# Altium PCB Motor-20.PcbDoc
Units mil, origin at the board's own origin, x right, y up, seen from the top; angles counter-clockwise.
Board outline 792.43 x 792.43 mil, 4 copper layers (Top1, Signal2, Gnd3, Bottom4), stack 30.634 mil thick; 54 components, 63 nets, 207 pads, 120 vias.
Unrouted connection lines stored in the file: 54.
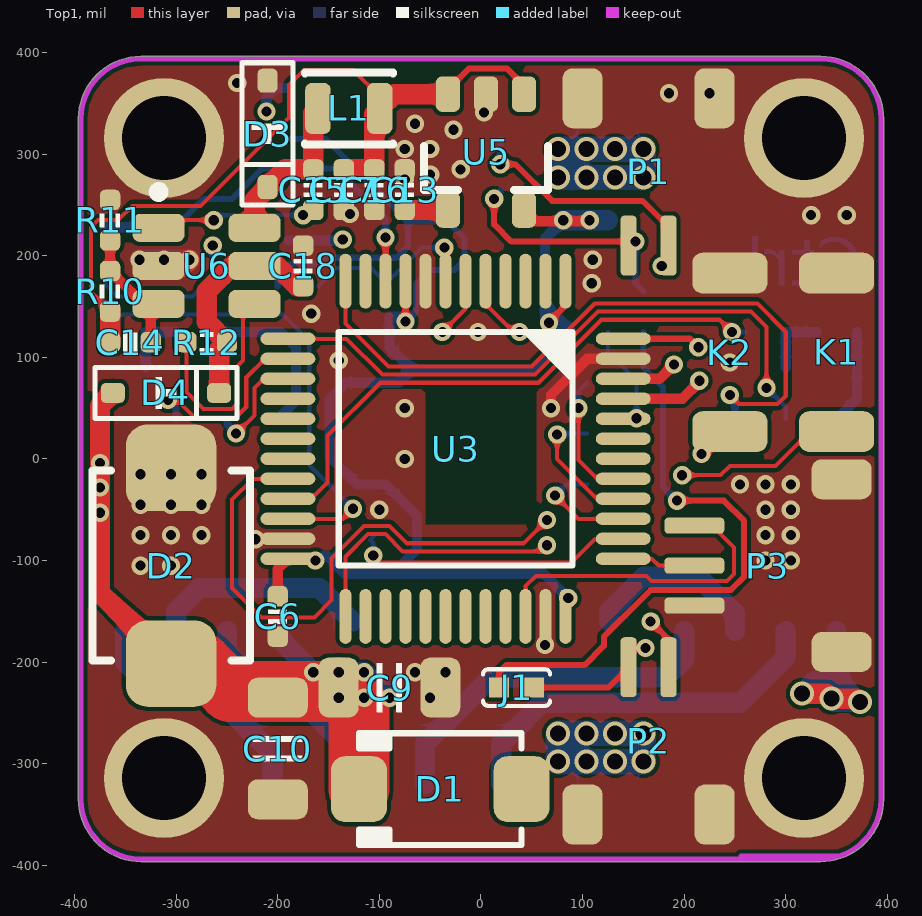
[diagram p0: Top1 view]
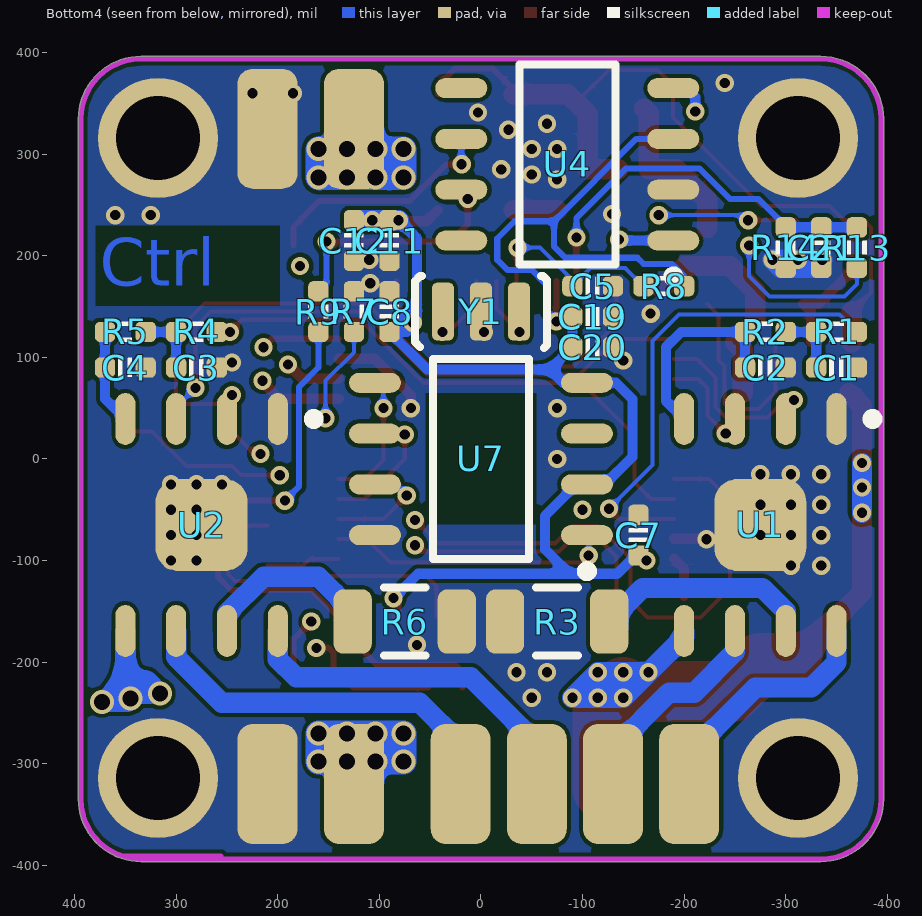
[diagram p1: Bottom4 view, seen from below]
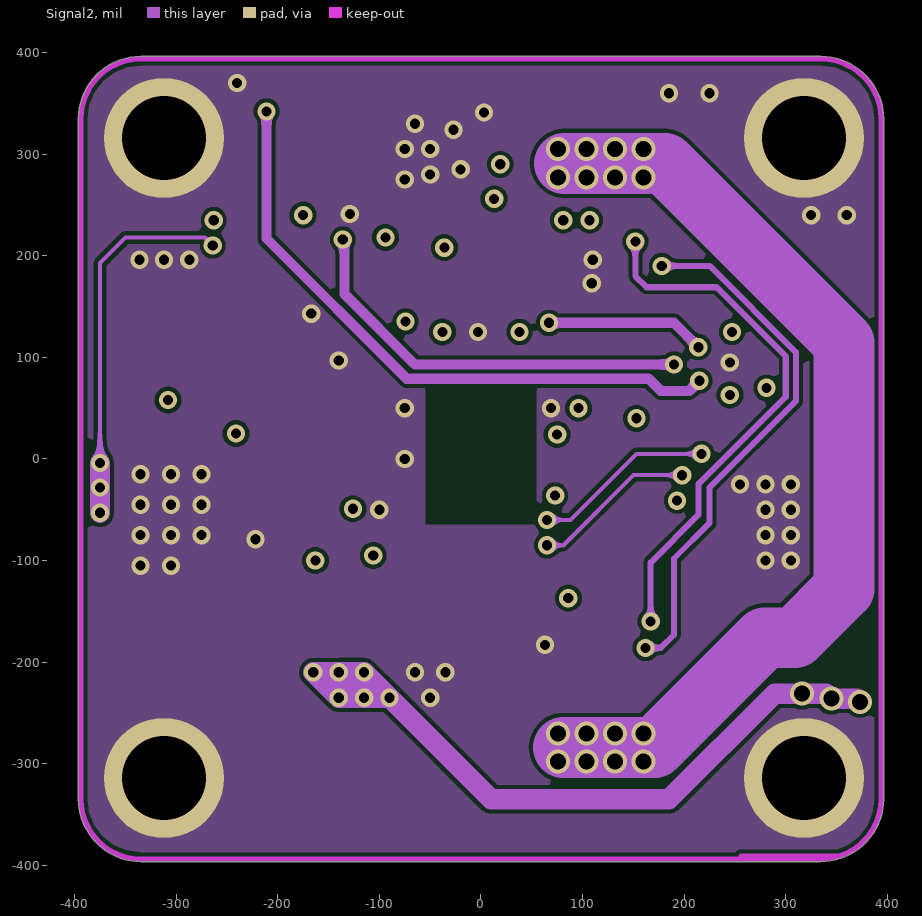
[diagram p2: Signal2]
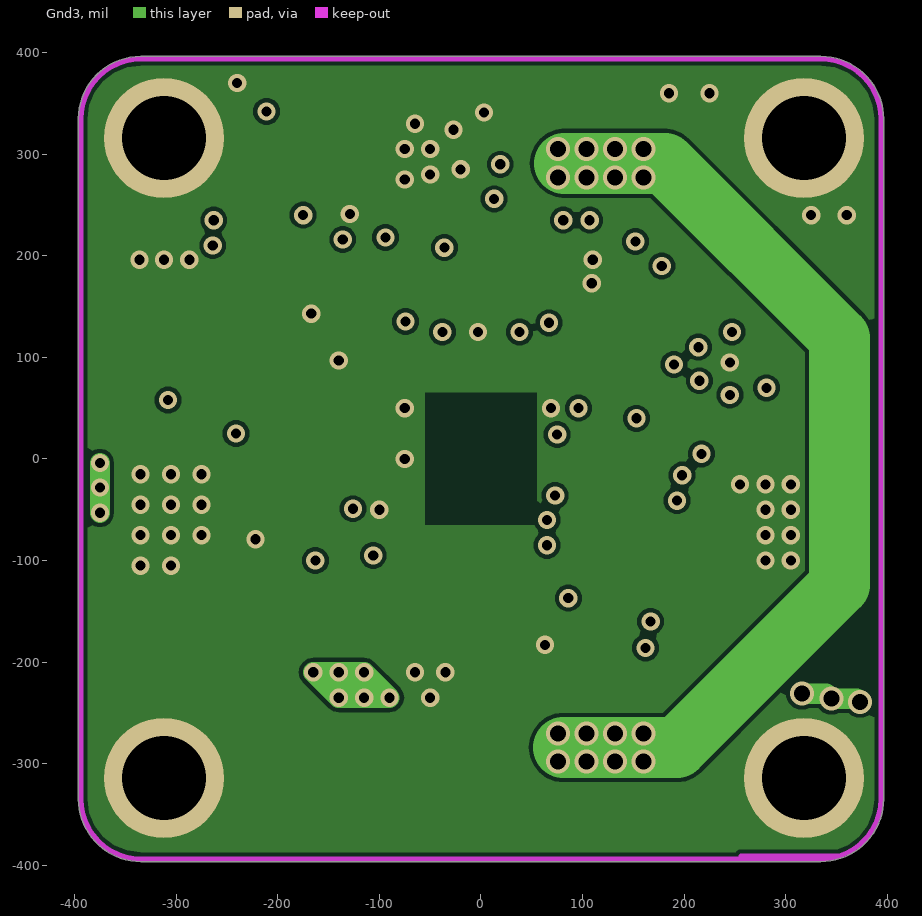
[diagram p3: Gnd3]
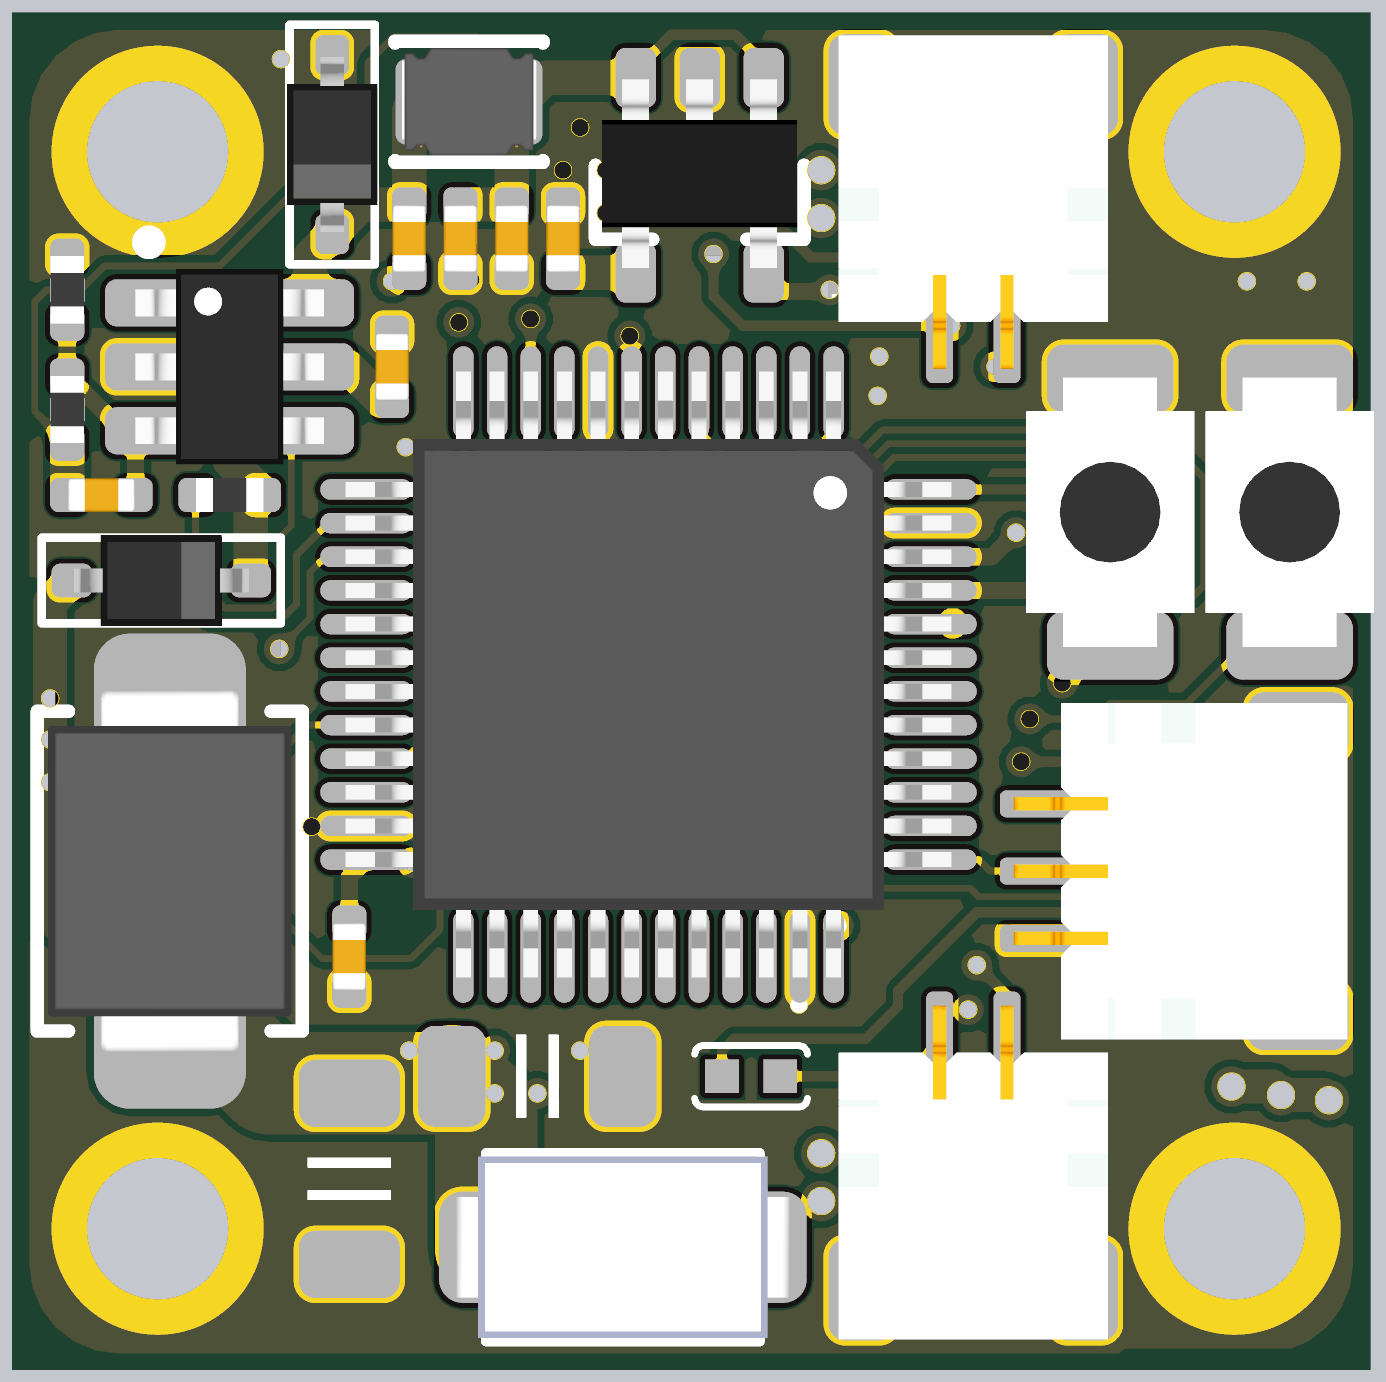
[diagram p4: 3D render of the assembled board from above, using the file's embedded part models]
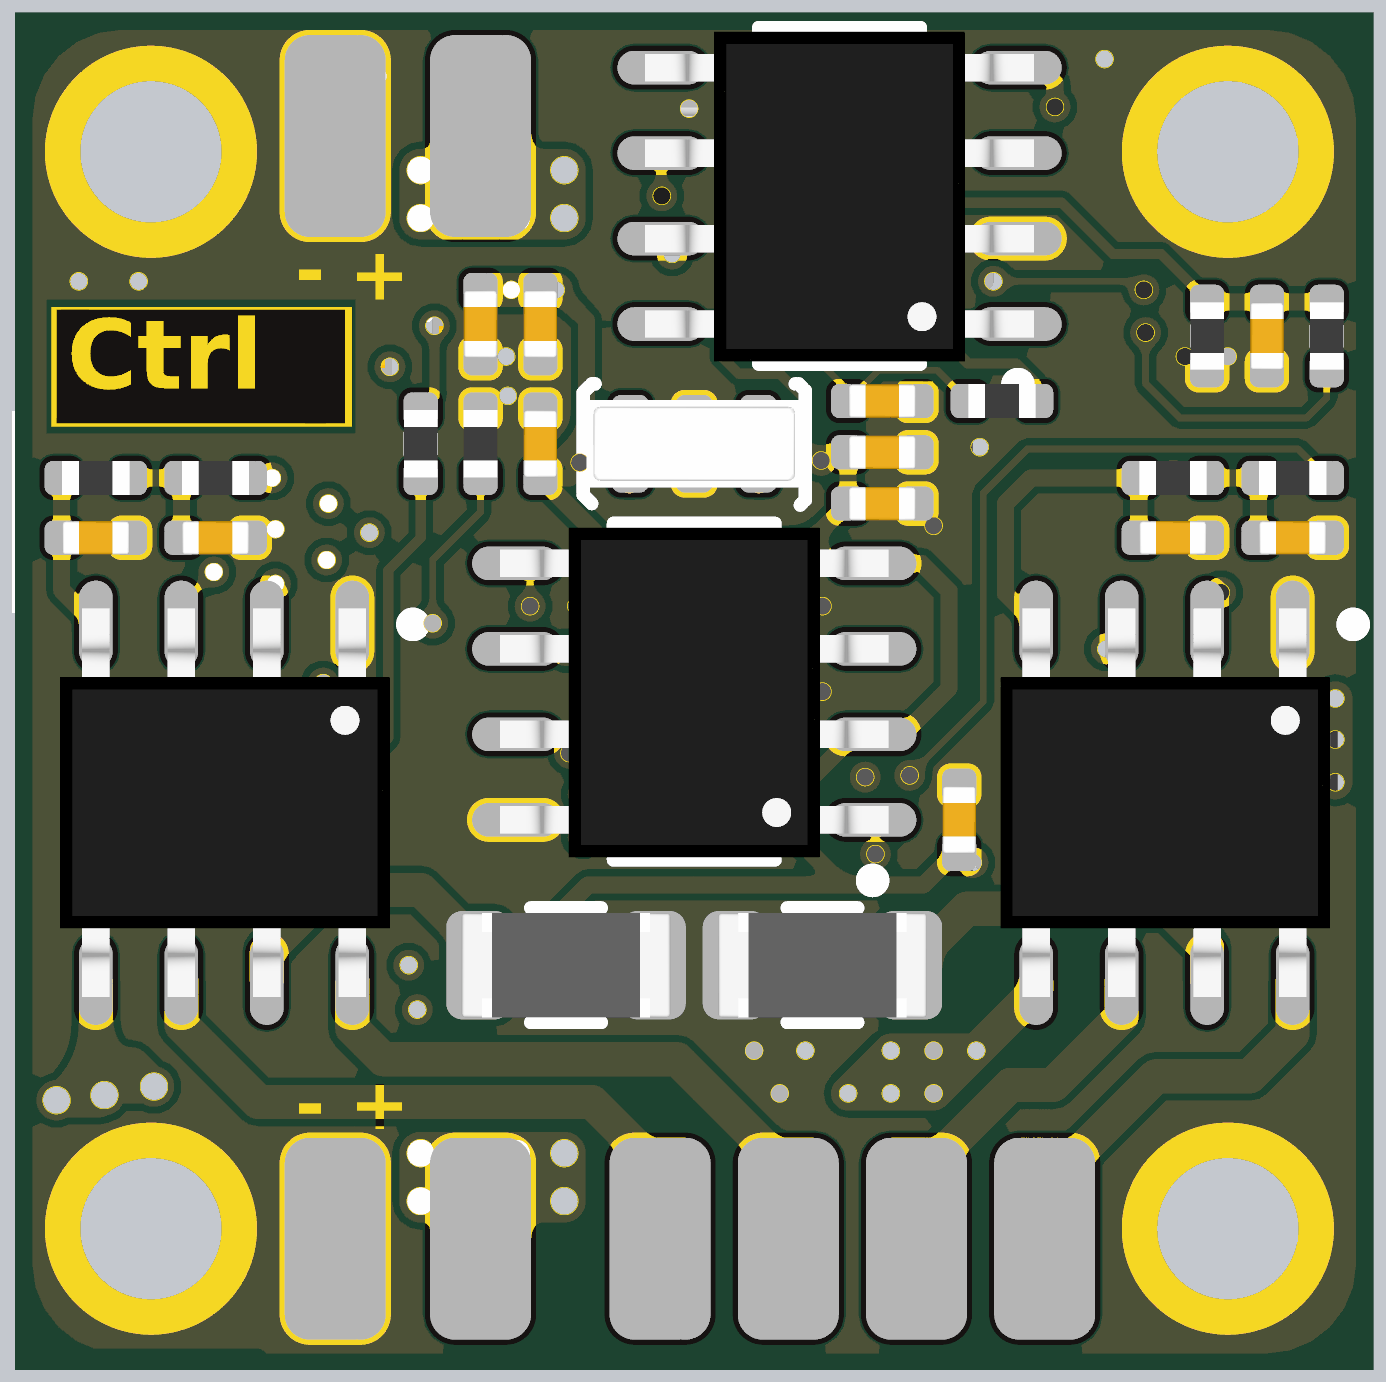
[diagram p5: 3D render of the assembled board from below, using the file's embedded part models]

## Layer stack, top to bottom
Top Solder: solder mask 0.4, Solder Resist, Dk 3.5
Top1: signal copper 1.4
Dielectric1: core 10, FR-4, Dk 4.2
Signal2: signal copper 1.417
Dielectric2: core 10, Dk 4.2
Gnd3: signal copper 1.417
Dielectric3: prepreg 5, Dk 4.2
Bottom4: signal copper 1.4
Bottom Solder: solder mask 0.4, Solder Resist, Dk 3.5

## Board outline
-396.22,-334.65 -396.22,334.65 cw(c-334.65,334.65) -334.65,396.22 334.65,396.22 cw(c334.65,334.65) 396.22,334.65 396.22,-334.65 cw(c334.65,-334.65) 353.73,-393.18 cw(c334.65,-334.65) 334.65,-396.22 -334.65,-396.22 cw(c-334.65,-334.65)

## Design rules (kind name [scope] priority, off if disabled: settings)
Clearance [All] p1: gap=4 ignorepadtopadclearanceinfootprint=FALSE except(0: Arc-Hole Track-Hole SMDPad-Hole THPad-Hole Via-Hole Fill-Hole Poly-Hole Region-Hole Text-Hole)
ComponentClearance [All] p1: gap=0 collisioncheckmode=3 verticalgap=0 showdistances=FALSE
DiffPairsRouting [All] p1: maxlimit=9 minlimit=9 mostfreqgap=9 toplayer_minwidth=15 toplayer_maxwidth=15 toplayer_prefwidth=15 midlayer1_minwidth=15 midlayer1_maxwidth=15 midlayer1_prefwidth=15 midlayer2_minwidth=15 midlayer2_maxwidth=15 midlayer2_prefwidth=15 bottomlayer_minwidth=15 bottomlayer_maxwidth=15 bottomlayer_prefwidth=15 maxuncoupledlength=500
FanoutControl Fanout_BGA [All] p1: bgadir=Out bgaviamode=Centered fanoutstyle=Auto fanoutdirection=Alternating viagrid=1 // Fanout_BGA (Default Rule)
HoleSize [All] p1: absolutevalues=TRUE maxlimit=10000 minlimit=8 maxpercent=80.000 minpercent=20.000
MinimumSolderMaskSliver [All] p1 off: minsoldermaskwidth=2
PlaneClearance [All] p1: clearance=8
PlaneConnect [All] p1: planeconnectstyle=Direct reliefexpansion=20 reliefentries=4 reliefconductorwidth=10 reliefairgap=10
PolygonConnect [All] p1: connectstyle=Direct reliefconductorwidth=10 reliefentries=4 polygonreliefangle="90 Angle" airgapwidth=10
RoutingVias [All] p1: holewidth=8 width=16 viastyle="Through Hole" minholewidth=6 minwidth=12 maxholewidth=28 maxwidth=50
SilkToSilkClearance [All] p1: silktosilkclearance=0
SilkToSolderMaskClearance [IsPad] p1: minsilkscreentomaskgap=0 clearancetoexposedcopper=TRUE
SolderMaskExpansion [All] p1: expansion=3 istentingtop=FALSE
Width GND [(InNet('AGND') OR InNet('GND'))] p1: maxlimit=50 minlimit=4 preferedwidth=10
Width VCC [(InNet('VDD_SYS_3.3V') OR InNet('VDD_AV_3.3V') OR InNet('VDD_5V') OR InNet('VDD1V2-SYS') OR InNet('VDD1V1-EPHY') OR InNet('VDD-CPUX') OR InNet('VDD-CPUS') OR InNet('VDD-CPUFB') OR InNet('VCC-DRAM'))] p2: maxlimit=50 minlimit=4 preferedwidth=10
Width [All] p3: maxlimit=10000 minlimit=4 preferedwidth=4
21 further rules are at their usual default settings.

## Classes and differential pairs
component class Port: J1 K1 K2 P1 P2 P3 R9 U4
component class MCU: C5 C6 C7 C8 R7 R8 U3 Y1
component class Interface: C19 R13 R14 U7
component class Drive: C1 C2 C3 C4 R1 R2 R3 R4 R5 R6 U1 U2
component class Power: C9 C10 C11 C12 C14 C15 C17 D1 D2 D3 D4 L1 R10 R11 R12 U5 U6

## Components (designator, comment, footprint, x,y, rotation, side; value= is the part's Value field where it differs from the comment)
C1 "0.1uF" CAP_0402 -350,90 r0 bottom value=0.1u
C2 "0.1uF" CAP_0402 -280,90 r0 bottom value=0.1u
C3 "0.1uF" CAP_0402 280,90 r0 bottom value=0.1u
C4 "0.1uF" CAP_0402 350,90 r0 bottom value=0.1u
C5 "0.1uF" CAP_0402 -110,170 r0 bottom value=0.1u
C6 "0.1uF" CAP_0402 -200,-155 r90 top value=0.1u
C7 "0.1uF" CAP_0402 -155,-75 r270 bottom value=0.1u
C8 "0.1uF" CAP_0402 90,145 r270 bottom value=0.1u
C9 "100uF" 1206-CAP -90,-225 r180 top value=0.1u
C10 "100uF" 1206-CAP -200,-285 r90 top value=0.1u
C11 "0.1uF" CAP_0402 90,215 r90 bottom value=0.1u
C12 "10uF" CAP_0402 125,215 r90 bottom value=0.1u
C13 "10nF" CAP_0402 -75,265 r270 top value=0.1u
C14 "100pF" CAP_0402 -345,115 r0 top value=0.1u
C15 "0.1uF" CAP_0402 -165,265 r270 top value=0.1u
C16 "0.1uF" CAP_0402 -105,265 r90 top value=0.1u
C17 "10uF" CAP_0402 -135,265 r90 top value=0.1u
C18 "10uF" CAP_0402 -175,190 r270 top value=0.1u
C19 "10uF" CAP_0402 -110,140 r0 bottom value=0.1u
C20 "0.1uF" CAP_0402 -110,110 r0 bottom value=0.1u
C21 "0.1uF" CAP_0402 -335,208 r90 bottom value=0.1u
D1 "SS54" DO-214AC -40,-325 r180 top
D2 "SMBJ28CA" SMBJ-CA_MFG -305,-105 r270 top
D3 "二极管-5819W" SOD-323 -210,320 r270 top
D4 "二极管-5819W" SOD-323 -310,65 r0 top
J1 "跳线" 0402-0R 35,-225 r0 top
K1 "TACT 2P" ButtonTACT_3x4x2_180 350,105 r270 top locked value=3x4
K2 "TACT 2P" ButtonTACT_3x4x2_180 245,105 r270 top locked value=3x4
L1 "6.8uH" IND-201612 -130,345 r0 top
P1 "SH1.0-2P" SH1.0-2P 165,210 r180 top locked
P2 "SH1.0-2P" SH1.0-2P 165,-205 r0 top locked
P3 "SH1.0-3P" SH1.0-3P 210,-105 r90 top locked
R1 "1K" RES_0402 -350,125 r0 bottom value=22R
R2 "1K" RES_0402 -280,125 r0 bottom value=22R
R3 "0.1R" 1206-RES -75,-160 r0 bottom value=22R
R4 "1K" RES_0402 280,125 r0 bottom value=22R
R5 "1K" RES_0402 350,125 r0 bottom value=22R
R6 "0.1R" 1206-RES 75,-160 r180 bottom value=22R
R7 "10K" RES_0402 125,145 r90 bottom value=22R
R8 "10K" RES_0402 -180,170 r180 bottom value=22R
R9 "120R" RES_0402 160,145 r270 bottom value=22R
R10 "10K" RES_0402 -365,165 r270 top value=22R
R11 "1.8K" RES_0402 -365,235 r270 top value=22R
R12 "1M" RES_0402 -270,115 r180 top value=22R
R13 "10K" RES_0402 -370,208 r90 bottom value=22R
R14 "1K" RES_0402 -300,208 r270 bottom value=22R
U1 "TB67H450FNG" SO-8-PAD -275,-65 r270 bottom locked
U2 "TB67H450FNG" SO-8-PAD 275,-65 r270 bottom locked
U3 "STM32F103CBT6" LQFP-48 -25,10 r270 top locked
U4 "SN65HVD232D" SO-8 -85,290 r0 bottom
U5 "LP2992 3V3" SOT23-5 5,300 r270 top
U6 "ME3116" SOT23-6 -270,190 r0 top
U7 "MT6816" SO-8 0,0 r0 bottom locked
Y1 "12MHz" 晶振-3P 0,145 r0 bottom

## Footprints (in the part's own frame and the unit in brackets; to place one, negate y for a bottom-side part, rotate by r counter-clockwise, add the part's x,y. Pads: shape width x height; smd on the part's side, far side on the other; paste and mask are expansions set on the pad)
0402-0R [mm] "选择焊盘"
  rect 0.5x0.5 smd: 1(-0.432,0) 2(0.432,0)
  silkscreen extent -0.84,-0.46 0.84,0.46
1206-CAP [mm]
  rrect50% 1x1.5 smd: 1(-1.27,0) 2(1.27,0)
  silkscreen extent -0.3,-0.61 0.3,0.61, body extent -1.5,-0.75 1.5,0.75, height 1.5
1206-RES [mil]
  rrect50% 37.64x63.38 smd paste+0 mask+0: 1(-51.22,0) 2(51.22,0)
  silkscreen extent -21,-33 21,33, body extent -61,-31 61,31, height 26
ButtonTACT_3x4x2_180 [mil]
  rrect50% 40x74 smd: 1(-78,0) 2(78,0)
  body extent -79,-49 79,49, height 63
CAP_0402 [mil]
  rrect50% 20x20 smd: 1(-20,0) 2(20,0)
  silkscreen extent -6,-9 6,9, body extent -20,-10 20,10, height 20
DO-214AC [mil] "SMA"
  rrect50% 55x65 smd: 1(-80,0) 2(80,0)
  silkscreen extent -80,-55 80,55, body extent -98,-53 98,53, height 85
IND-201612 [mil]
  rrect50% 25x50 smd paste+0 mask+0: 1(-30.46,0) 2(30.46,0)
  silkscreen extent -43,-35 43,35, body extent -39,-31 39,32, height 37
LQFP-48 [mil]
  oval 54x12 smd: 1(-165,108.27) 2(-165,88.58) 3(-165,68.9) 4(-165,49.21) 5(-165,29.53) 6(-165,9.84) 7(-165,-9.84) 8(-165,-29.53) 9(-165,-49.21) 10(-165,-68.9) 11(-165,-88.58) 12(-165,-108.27) 25(165,-108.27) 26(165,-88.58) 27(165,-68.9) 28(165,-49.21) 29(165,-29.53) 30(165,-9.84) 31(165,9.84) 32(165,29.53) 33(165,49.21) 34(165,68.9) 35(165,88.58) 36(165,108.27)
  oval 12x54 smd: 13(-108.27,-165) 14(-88.58,-165) 15(-68.9,-165) 16(-49.21,-165) 17(-29.53,-165) 18(-9.84,-165) 19(9.84,-165) 20(29.53,-165) 21(49.21,-165) 22(68.9,-165) 23(88.58,-165) 24(108.27,-165) 37(108.27,165) 38(88.58,165) 39(68.9,165) 40(49.21,165) 41(29.53,165) 42(9.84,165) 43(-9.84,165) 44(-29.53,165) 45(-49.21,165) 46(-68.9,165) 47(-88.58,165) 48(-108.27,165)
  silkscreen extent -115,-115 115,115, body extent -177,-177 177,177, height 61
RES_0402 [mil]
  rrect50% 20x20 smd: 1(-20,0) 2(20,0)
  silkscreen extent -6,-10 6,10, body extent -20,-10 20,10, height 14
SH1.0-2P [mm]
  rrect50% 0.4x1.5 smd: 1(-0.5,0) 2(0.5,0)
  rrect50% 1x1.5 smd: SH1(-1.651,-3.683) SH2(1.651,-3.683)
  body extent -2,-4.42 2,0.54, height 3.06
SH1.0-3P [mm]
  rrect50% 0.4x1.5 smd: 1(-1,0) 2(0,0) 3(1,0)
  rrect50% 1x1.5 smd: SH1(-2.159,-3.683) SH2(2.159,-3.683)
  body extent -2.5,-4.42 2.5,0.54, height 3.06
SMBJ-CA_MFG [mm]
  rrect50% 2.16x2.26 smd paste+0 mask+0: 1(-2.45,0) 2(2.45,0)
  silkscreen extent -2.37,-1.97 2.37,1.97, body extent -2.7,-1.81 2.7,1.81, height 2.62
SO-8 [mm]
  oval 1.3x0.5 smd: 1(-2.65,1.905) 2(-2.65,0.635) 3(-2.65,-0.635) 4(-2.65,-1.905) 5(2.65,-1.905) 6(2.65,-0.635) 7(2.65,0.635) 8(2.65,1.905)
  silkscreen extent -2.77,-2.5 1.2,2.93, body extent -2.89,-2.44 2.89,2.46, height 1.45
SO-8-PAD [mm]
  oval 1.3x0.5 smd: 1(-2.65,1.905) 2(-2.65,0.635) 3(-2.65,-0.635) 4(-2.65,-1.905) 5(2.65,-1.905) 6(2.65,-0.635) 7(2.65,0.635) 8(2.65,1.905)
  rrect50% 2.3x2.3 smd: 9(0,0)
  silkscreen extent -2.77,2.68 -2.53,2.93, body extent -2.89,-2.44 2.89,2.46, height 1.45
SOD-323 [mm]
  rrect50% 0.6x0.5 smd: 1(-1.329,0) 2(1.329,0)
  silkscreen extent -1.78,-0.64 1.78,0.64, body extent -1.3,-0.68 1.3,0.67, height 1.15
SOT23-5 [mm] "SOT23, 3-Leads, Body 3.1x3.0mm (max), Pitch 0.95mm, IPC Medium Density"
  rrect50% 0.889x0.6 smd: 1(-1.5,0.95) 2(-1.5,0) 3(-1.5,-0.95) 4(1.396,-0.95) 5(1.396,0.95)
  silkscreen extent -0.2,-1.55 0.9,1.55, body extent -1.48,-1.45 1.32,1.45, height 1.2
SOT23-6 [mm]
  rrect50% 1.3x0.7 smd: 1(-1.2,0.95) 2(-1.2,0) 3(-1.2,-0.95) 4(1.2,-0.95) 5(1.2,0) 6(1.2,0.95)
  silkscreen extent -1.32,1.73 -1.07,1.97, body extent -1.4,-1.45 1.4,1.45, height 1.45
晶振-3P [mm] "贴片晶振"
  rrect50% 0.55x1.45 smd: 1(-0.95,0) 2(0,0) 3(0.95,0)
  silkscreen extent -1.65,-0.89 1.65,0.91, body extent -1.6,-0.89 1.65,0.89, height 0.7

## Part data
C1 C2 C3 C4 C5 C6 C7 C8 C11 C12 C13 C14 C15 C16 C17 C18 C19 C20 C21: library part 电容-0402, "Capacitor"
C9 C10: library part 电容-1206, "Capacitor"
D1: library part Diode_SMA, "Diode", Type=SMA
D3 D4: "40V"
J1: "Resistor", LatestRevisionDate=17-Jul-2002, LatestRevisionNote="Re-released for DXP Platform.", PackageDescription="Axial Device, Thru-Hole; 2 Leads; 0.4 in Pin Spacing", PackageReference=AXIAL-0.4, Published=8-Jun-2000, Publisher="Altium Limited"
K1 K2: library part ButtonTACT_3x4x2_180, "Button", Type="TACT 2P"
L1: library part 电感-201612
P3: "Header"
R1 R2 R4 R5 R7 R8 R9 R10 R11 R12 R13 R14: library part 电阻-0402, "Resistor"
R3 R6: library part 电阻-1206, "Resistor"
U1 U2: "PWM Chopper Type DC Brushed Motor Driver"
U3: "ARM Cortex-M3 32-bit MCU, 128 KB Flash, 20 KB Internal RAM, 37 I/Os, 48-pin LQFP, -40 to 85 degC, Tray", I/Os (High Current)=37, Operating Frequency(F) (Processor speed) (MHz)=72, Supplier Part Number 1=497-6288-ND, Supply Voltage(Vcc) min (V)=2, A/D Converter="2x12-bit (10 Channel)", ComponentLink1Description="Manufacturer URL", ComponentLink1URL=http://www.st.com/web/en/home.html, ComponentLink2Description=Datasheet, ComponentLink2URL=http://www.st.com/st-web-ui/static/active/en/resource/technical/document/datasheet/CD00161566.pdf, ComponentLink3Description="Package Specification", ComponentLink3URL=http://www.st.com/st-web-ui/static/active/en/resource/technical/document/datasheet/DM00058181.pdf, Core="ARM Cortex-M3", DatasheetVersion="Rev. 16", FLASH Size (Prog) (kB)=128, Internal RAM Size (kB)=20, Mounting Technology="Surface Mount", PackageDescription="48-Pin Low Profile Quad Flat Package, 7 x 7 mm Body, 0.5 mm Pitch", PackageReference=LQFP48, PackageVersion="Rev. 6, 06/2013", Packing=Tray, PartNumber=STM32F103CBT6, Supplier 1=Digi-Key, Supplier 2=Farnell, Supplier 3=Newark, Supplier 4=Newark, Supplier 5=Mouser, Supplier Part Number 2=1606327, Supplier Part Number 3=11N8296, Supplier Part Number 4=57P1214, Supplier Part Number 5=511-STM32F103CBT6
U4: Manufacturer="Texas Instruments", Manufacturer Part Number=SN65HVD232DR, Operating Temperature="-40°C ~ 85°C", Package / Case="8-SOIC (0.154\", 3.90mm Width)", Supplier Device Package=8-SOIC, Supplier Part Number 1=296-26344-2-ND, Voltage - Supply="3 V ~ 3.6 V", Category="Integrated Circuits (ICs)", ComponentLink1Description=http://www.ti.com/lit/ds/symlink/sn65hvd230.pdf, ComponentLink1URL=http://www.ti.com/lit/ds/symlink/sn65hvd230.pdf, Data Rate=1Mbps, Duplex=Half, Mounting Type="Surface Mount", Number of Drivers/Receivers=1/1, Packaging="Tape & Reel (TR)", Part Status=Active, Pricing 1="2500=0.84375 (USD)", Pricing 2="1=2.05, 10=1.842, 100=1.4809, 500=1.21668, 1000=1.00811 (USD)", Protocol=CAN, RoHS="RoHS Compliant", Stock=5000, Supplier 1=Digi-Key, Supplier 2=Digi-Key, Supplier Part Number 2=296-26344-1-ND, Type=Transceiver
U5: library part LP2992, "LDO"
U6: "DC-DC"
U7: "Magnetic Position Sensor"
Y1: library part 晶振-3Pin, "村田贴片"

## Free pads (board coordinates)
  round 118.11 hole 82.68: ""(-312.13,-314.14) ""(-312.13,315.78) ""(317.79,-314.14) ""(317.79,315.78)
  rrect50% 59.06x118.11 smd far side: ""(-205,-320) ""(-130,-320) ""(-55,-320) ""(20,-320) ""(125,-320) ""(125,325) ""(210,-320) ""(210,325)

## Via types
v1: diameter 18, hole 10, Top1 to Bottom4, tented both sides, 101 vias
v2: diameter 23.62, hole 15.75, Top1 to Bottom4, tented both sides, 19 vias

## Nets (pads, with @x,y where several pads share a name; then routed paths per layer and width w, separated by ;. In a path a pad name is that pad's centre, name@x,y a point inside that pad or via, vN(x,y) a via of type N, cw(c..) or ccw(c..) an arc to the next point about the centre after c; other vN are vias at no path point)
BUTTON_DOWN: K2.2 U3.20 | length 766.4
  Top1 w4: U3.20 -224.53,-19.53 -245,-40 -245,-127 -216,-156 -164,-156 -147,-139 -147,-98 -115,-66 -90,-66 -73,-83 42,-83 v1(65,-60) ; v1(217,5) 223,5 K2.2
  Signal2 w4: v1(65,-60) 88,-60 153,5 v1(217,5)
BUTTON_UP: K1.2 U3.25 | length 607.1
  Top1 w4: U3.25 -133.27,-96.27 -111,-74 -94,-74 -77,-91 59,-91 v1(65,-85) ; v1(198,-16) 236,-16 245,-7 290,-7 324,27 K1.2
  Signal2 w4: v1(65,-85) 81,-85 150,-16 v1(198,-16)
CAN_H: P1.2 P2.2 R9.1 U4.7 | length 813.1
  Top1 w6: v1(13,256) 13,231 30,214 141.32,214 P1.2 ; v1(167,-160) 184.69,-177.68 P2.2
  Signal2 w6: v1(152,214) 152,180 163,169 232,169 300,101 300,61.14 214,-24.86 214,-55 167,-102 v1(167,-160)
  Bottom4 w6: v1(13,256) 19.33,262.33 U4.7 ; v1(152,214) 152,173 R9.1
CAN_L: J1.2 P1.1 P2.1 U4.6 | length 897.6
  Top1 w6: v1(19,290) 34,290 70,254 159,254 184.69,228.31 P1.1 ; J1.2 125.31,-225 P2.1 145.31,-190.69 150,-186 v1(162,-186)
  Signal2 w6: v1(162,-186) 177,-186 190,-173 190,-98 225,-63 225,-28 310,57 310,105.14 225.14,190 v1(178,190)
  Bottom4 w6: v1(19,290) 19.33,290.33 U4.6
CAN_RX: U3.45 U4.4 | length 735.8
  Top1 w10: U3.45 198.21,59.21 v1@213,74
  Signal2 w10: v1(-211,342) -211,217 -73,79 165,79 177,67 205,67 v1(215,77)
  Bottom4 w10: v1(-211,342) -211,356 -202,365 U4.4
CAN_SILENT: U3.2
CAN_TX: U3.46 U4.1 | length 515.6
  Top1 w10: U3.46 175.9,78.9 v1(190,93)
  Signal2 w10: v1(-136,216) -134.47,214.47 -134.47,162.47 -65,93 v1(190,93)
  Bottom4 w10: U4.1 v1@-137,215
GND: C1.1 C2.1 C3.1 C4.1 C5.1 C6.1 C7.1 C8.1 C9.1 C10.1 C11.1 C12.1 C13.1 C16.1 C17.1 C18.1 C19.1 C20.1 C21.1 D2.1 D3.1 K1.1 K2.1 P1.SH1 P1.SH2 P2.SH1 P2.SH2 P3.1 P3.SH1 P3.SH2 pad.@210,325 pad.@210,-320 pad.@317.79,315.78 pad.@317.79,-314.14 pad.@-312.13,315.78 pad.@-312.13,-314.14 R3.2 R6.2 R7.2 R11.1 R14.2 U1.1 U1.9 U2.1 U2.9 U3.8 U3.23 U3.35 U3.47 U4.2 U5.2 U6.2 U7.8 Y1.2 | length 268.3
  Top1 w10: v1(-222,-79) -221.58,-78.58 U3.23 ; v1(69,50) 69,63 104.58,98.58 U3.47
  Top1 w20: U6.2 -293,190 v1(-287,196)
  Bottom4 w20: v1(-336,196) -328,188 R14.2 -295,188 v1(-287,196) v1(-312,196) v1(-336,196)
  other v1: -50,-235 -65,-210 -35,-210 63,-183 -335,-105 -305,-105 280,-100 305,-100 -335,-75 -305,-75 -275,-75 280,-75 305,-75 -100,-50 280,-50 305,-50 -335,-45 -305,-45 -275,-45 255,-25 280,-25 305,-25 -335,-15 -305,-15 -275,-15 -75,0 -75,50 245,95 -140,97 -3,125 -167,143 109,173 110,196 325,240 360,240 -129,241 -75,275 -50,280 -20,285 -75,305 -50,305 -27,324 -65,330 3,341 185,360 225,360 -240,370
IN_AM: U1.2 U3.14 | length 187.9
  Top1 w4: v1(-308,58) -299,58 -282,41 -241,41 -231,51 -231,80 -212.42,98.58 U3.14
  Bottom4 w7: v1(-308,58) -300,50 U1.2
IN_AP: U1.3 U3.15 | length 107.2
  Top1 w4: v1(-241,25) -223,43 -223,70 -214.1,78.9 U3.15
  Bottom4 w7: U1.3 -250,34 v1(-241,25)
IN_BM: U2.2 U3.12 | length 680.6
  Top1 w4: U3.12 -133.27,133.27 -91,91 50,91 112,153 272,153 300,125 300,62 292,54 254,54 v1(245,63)
  Bottom4 w7: v1(245,63) 250,58 U2.2
IN_BP: U2.3 U3.13 | length 616
  Top1 w4: U3.13 -132.27,118.27 -97,83 53.31,83 115.31,145 266,145 281,130 v1(281,70)
  Bottom4 w4: v1(281,70) 300,51 U2.3
IN_PWM_A: R1.1 U3.22 | length 469.7
  Top1 w4: U3.22 -135.9,-58.9 v1(-126,-49)
  Bottom4 w4: R1.1 -353,142 -195,142 -169,116 -169,-6 v1(-126,-49)
IN_PWM_B: R4.1 U3.21 | length 554.9
  Top1 w4: U3.21 -167.21,-39.21 -151,-23 -151,23 -99,75 56.63,75 118.63,137 235,137 v1(247,125)
  Bottom4 w4: v1(247,125) R4.1
MT6816_CS: U3.38 U7.1 | length 281.8
  Top1 w4: v1(-106,-95) -99,-102 89,-102 112.42,-78.58 U3.38
  Bottom4 w4: v1(-106,-95) -106,-82.67 -109,-79.67 U7.1
NetC1_2: C1.2 R1.2 R2.1 | length 65
  Bottom4 w10: C1.2 R1.2 R2.1
NetC3_2: C3.2 R4.2 R5.1 | length 65
  Bottom4 w10: C3.2 R4.2 R5.1
NetC5_2: C5.2 R8.1 U3.7 | length 191.6
  Top1 w4: v1(-36,208) -34.84,206.84 U3.7
  Bottom4 w4: R8.1 -142,188 -108,188 C5.2 -90,176 -58,208 v1(-36,208)
NetC13_2: C13.2 U5.4 | length 42.6
  Top1 w20: C13.2 -32.46,245 U5.4
NetC14_2: C14.2 R10.1 R11.2 U6.3 | length 132
  Top1 w10: R11.2 R10.1 -332.6,152.6 U6.3 -325,144.84 C14.2
NetC15_1: C15.1 D3.2 L1.1 U6.6 | length 159.6
  Top1 w20: U6.6 -222.76,254.91 D3.2 -192.66,285 C15.1 -165,340.46 L1.1
NetC15_2: C15.2 U6.1 | length 147.5
  Top1 w4: U6.1 -309.65,235 v1(-263,235)
  Bottom4 w4: v1(-263,235) -258,240 v1(-175,240)
NetC18_2: C18.2 D4.2 R12.1 U6.5 | length 225.1
  Top1 w20: D4.2 -257.66,107.34 R12.1 -270,135 -270,165 -245,190 U6.5 -201,190 -181,170 C18.2
NetJ1_1: J1.1 R9.2 | length 609.2
  Top1 w6: J1.1 18,-210 25,-203 102,-203 121,-184 121,-175 167,-129 246,-129 259,-116 259,-61 239,-41 v1(193,-41)
  Bottom4 w6: R9.2 160,90 179,71 179,-27 v1(193,-41)
NetR3_1: R3.1 U1.7 | length 216.3
  Bottom4 w20: U1.7 -300,-150 -277,-127 -159.22,-127 R3.1
NetR6_1: R6.1 U2.7 | length 180.2
  Bottom4 w20: R6.1 126.22,-149.78 160,-116 214,-116 250,-152 U2.7
NetR7_1: R7.1 U3.44 | length 96.6
  Bottom4 w4: R7.1 125,105 153,77 v1(153,40)
NetR12_2: R12.2 U6.4 | length 217.5
  Top1 w4: R12.2 -290,66 -273,49 -245,49 -239.5,54.5 -239.5,91.5 -234,97 ; -234,100.68 -234,97 ; U6.4 -234,141.35 -234,97
NetU3_5: U3.5 Y1.3 | length 67.4
  Top1 w4: U3.5 4.53,152.47 32,125 v1(38,125)
NetU3_6: U3.6 Y1.1 | length 59.5
  Top1 w4: v1(-38,125) -15.16,147.84 U3.6
OLED_DC: U3.29
OLED_RES: U3.30
OUT_A+: pad.@-130,-320 U1.6 | length 215
  Bottom4 w20: U1.6 -250,-190 -210,-230 -185,-230 -130,-285 pad.@-130,-320
OUT_A-: pad.@-205,-320 U1.8 | length 242.9
  Bottom4 w20: U1.8 -350,-200 -325,-225 -270,-225 -205,-290 pad.@-205,-320
OUT_B+: pad.@20,-320 U2.6 | length 380.9
  Bottom4 w20: pad.@20,-320 20,-280 60,-240 255,-240 300,-195 U2.6
OUT_B-: pad.@-55,-320 U2.8 | length 357
  Bottom4 w20: pad.@-55,-320 -55,-280 10,-215 182,-215 200,-197 U2.8
PA1: U3.11
PA10: U3.31
PC14: U3.3
PC15: U3.4
POWER_U: C21.2 R13.2 R14.1 U3.10 | length 381.9
  Top1 w6: v1(-94,218) -93.9,217.9 U3.10
  Bottom4 w6: R14.1@-300,229 -273,256 -245,256 -215,286 -143,286 -94,237 v1(-94,218)
  Bottom4 w10: R13.2 C21.2 R14.1
SIGNAL_ALERT: U3.19
SIGNAL_DIR: U3.17
SIGNAL_ENA: U3.18
SIGNAL_PUL: U3.16
SPI1_MISO: U3.40 U7.6 | length 135
  Top1 w4: v1(75,24) 75,0 114.21,-39.21 U3.40
  Bottom4 w4: v1(75,24) 76,25 U7.6
SPI1_MOSI: U3.41 U7.5 | length 131.1
  Top1 w4: v1(96,50) 96,-1 114.53,-19.53 U3.41
  Bottom4 w4: v1(96,50) 96,66.67 U7.5
SPI1_SCK: U3.39 U7.7 | length 112.4
  Top1 w4: v1(73,-36) 95.9,-58.9 U3.39
  Bottom4 w4: v1(73,-36) 84,-25 U7.7
SPI2_MISO: U3.27
SPI2_MOSI: U3.28
SPI2_SCK: U3.26
SWCLK: P3.2 U3.37 | length 72.8
  Top1 w4: U3.37 168.27,-98.27 175,-105 P3.2
SWDIO: P3.3 U3.34 | length 318.2
  Top1 w4: U3.34 43.9,-125.1 54,-115 163,-115 168,-120 242.27,-120 249,-113.27 249,-87 227.63,-65.63 P3.3
UART1_RX: U3.43
UART1_TX: U3.42
USB_DM: U3.32
USB_DP: U3.33
VCC: C9.2 C10.2 D1.2 D2.2 D4.1 R13.1 U1.5 U2.5 | length 2743.8
  Top1 w20: D4.1 -375,52.34 v1(-375,-4) v1(-375,-28) v1(-375,-53) -375,-131.46 D2.2 ; v2(316,-231) 340,-231 v2(345,-236) 370,-236 v2(373,-239)
  Top1 w60: D2.2 -274.54,-201.46 -247,-229 -144.01,-229 C9.2 -120,-245 D1.2
  Signal2 w4: v1(-375,-4) -375,193 -350,218 -272,218 v1(-264,210)
  Signal2 w20: v1(-375,-53) v1(-375,-28) v1(-375,-4) ; v2(373,-239) 370,-236 v2(345,-236) 340,-231 v2(316,-231) 289,-231 185,-335 10,-335 v1(-90,-235) ; v1(-140,-210) v1(-115,-235) ; v1(-140,-210) v1(-115,-210) v1(-90,-235) ; v1(-140,-210) v1(-165,-210) v1(-140,-235) v1(-115,-235) ; v1(-115,-235) v1(-90,-235)
  Gnd3 w20: v1(-375,-53) v1(-375,-28) v1(-375,-4) ; v2(316,-231) 340,-231 v2(345,-236) 370,-236 v2(373,-239) ; v1(-140,-210) v1(-115,-235) ; v1(-140,-210) v1(-115,-210) v1(-90,-235) v1(-115,-235) ; v1(-140,-210) v1(-165,-210) v1(-140,-235) v1(-115,-235)
  Bottom4 w4: R13.1 -370,172 -358,160 -284,160 -264,180 v1(-264,210)
  Bottom4 w20: v1(-375,-53) v1(-375,-28) v1(-375,-4) ; U1.5 -200,-175 v1(-165,-210) ; U2.5 350,-218 ; v2(373,-239) v2@371,-239 ; v1(-165,-210) v1(-140,-235) v1(-115,-235) ; v1(-165,-210) v1(-140,-210) ; v1(-140,-210) v1(-115,-235) ; v1(-140,-210) v1(-115,-210) v1(-90,-235) v1(-115,-235) ; 350,-218 329,-218 v2(316,-231) 340,-231 v2(345,-236) 348,-239 v2@371,-239 ; 350,-218 v2@371,-239
VCC_3V3: C6.2 C7.2 C8.2 C11.2 C12.2 C19.2 C20.2 R8.2 U3.1 U3.9 U3.24 U3.36 U3.48 U4.3 U5.5 U7.2 U7.4 | length 2024.3
  Top1 w6: v1(-74.21,135.21) U3.9 ; v1(67,134) 67,135 83.27,151.27 U3.1 ; U3.48 205.73,118.27 v1(214,110)
  Top1 w10: C6.2 -200,-108.27 U3.24 ; U5.5 53.46,234 v1@82,234 ; v1(81,235) v1@82,234 ; U3.36 83.27,-139.73 v1(86,-137) ; v1@83.27,232.73 v1@82,234 ; v1@107,234 v1@82,234
  Signal2 w10: v1(67,134) 190,134 v1(214,110)
  Bottom4 w6: R8.2 -200,180 -188,192 -160,192 -154,198 -83,198 -72,209 -72,234 ; U4.3 -153,315 -72,234 ; v1(-74.21,135.21) -64,145.42 -64,172 -50,186 -26,186 -16,196 -16,217 -33,234 -72,234
  Bottom4 w10: C7.2 -152,-95 -134,-113 -87,-113 ; v1(-74.21,135.21) -79,140 C19.2 C20.2 -68,88 ; v1(81,235) 63,217 63,152 ; v1(86,-137) 62,-113 -87,-113 ; -87,-113 -63,-89 -63,-56 -94,-25 U7.2 -122,-25 -149,2 -149,59 -133,75 U7.4 -81,75 -68,88 ; -68,88 53,88 C8.2 C8.2@89,125 ; 63,152 82,133 81,133 C8.2@89,125 ; 63,152 63,135 64,134 v1(67,134) 67,131 73,125 C8.2@89,125
  Bottom4 w20: v1(81,235) C11.2 v1(107,235) C12.2
  other v1: -163,-100
VCC_5V: C14.1 C16.2 C17.2 L1.2 R10.2 U5.1 U5.3 | length 779.3
  Top1 w4: R10.2 -384,164 -384,228 -377,235 -357,235 -343,249 -276,249 -189,336 -189,368 -174,383 -126,383 -99.54,356.54 L1.2
  Top1 w6: U5.3 -32.4,363.6 -11.8,384.2 25.8,384.2 42.4,367.6 U5.1
  Top1 w20: C14.1 R10.2 ; C17.2 C16.2 -105,339.54 L1.2 -85.48,359.06 U5.3
VCC_IN: D1.1 pad.@125,325 pad.@125,-320 | length 2382.4
  Signal2 w60: 81,-284 132,-284 171,-284 279,-176 309,-176 357.2,-127.8 357.2,114.8 181,291 132,291 82,291
  Gnd3 w60: 81,-284 193,-284 353,-124 353,119 181,291 82,291
  Bottom4 w25: v2(76,-270) v2(104,-298) ; v2(76,-270) v2(76,-298) v2(104,-298) ; v2(76,-270) v2(104,-270) v2(132,-270) v2(160,-270) v2(160,-298) v2(132,-298) v2(104,-298) ; v2(76,305) 90.5,290.5 v2(104,277) ; v2(76,305) v2(104,305) v2(132,305) v2(160,305) v2(160,277) v2(132,277) v2(104,277) ; v2(76,305) v2(76,277) v2(104,277)
VREF_A: C2.2 R2.2 U1.4 | length 197.3
  Bottom4 w10: C2.2 R2.2 -197,125 -182,110 -182,57.33 U1.4
VREF_B: C4.2 R5.2 U2.4 | length 94
  Bottom4 w10: U2.4 370,59.33 C4.2 R5.2
pads on no net: U4.5 U4.8 U7.3

## Polygon pours and split planes (outlines as drawn)
GND on Gnd3 "GND_L03_P002" (solid, remove dead copper, pour order 2): -395,395 395,395 395,-400 -395,-400
GND on Top1 "GND_L01_P000" (solid, remove dead copper, pour order 0): -395,395 395,395 395,-400 -395,-400
GND on Signal2 "GND_L02_P001" (solid, remove dead copper, pour order 1): -395,395 395,395 395,-400 -395,-400
GND on Bottom4 "GND_L04_P003" (solid, remove dead copper, pour order 3): -395,395 395,395 395,-400 -395,-400

## Keep-outs
Keep-Out Layer:
  lines w5: 352.95,-390.79 cw(c334.65,-334.65) 334.65,-393.7 -255.91,-393.7 -334.65,-393.7 cw(c-334.65,-334.65) -393.7,-334.65 -393.7,-255.91 -393.7,255.91 -393.7,334.65 cw(c-334.65,334.65) -334.65,393.7 -255.91,393.7 255.91,393.7 334.65,393.7 cw(c334.65,334.65) 393.7,334.65 393.7,255.91 393.7,-255.91 393.7,-334.65 cw(c334.65,-334.65) 352.95,-390.79 ; 352.95,-390.79 255.91,-390.79 352.95,-390.79

## Other copper
Top1:
  pour cut-out: -55,65 55,65 55,-65 -55,-65
Signal2:
  pour cut-out: -55,65 55,65 55,-65 -55,-65
Gnd3:
  pour cut-out: -55,65 55,65 55,-65 -55,-65
Bottom4:
  pour cut-out: -55,65 55,65 55,-65 -55,-65
  text "Ctrl" at 375,155 h80

## Silkscreen, mask and mechanical layers (free items; w line width, h text height)
Bottom Solder:
  region: 200,225 200,155 376,155 376,225
  text "+ -" at 91.87,292.17 h60 r180
  text "+ -" at 91.87,-292.17 h60
Mechanical 1:
  circle w10: c0,0 r98.43
  lines w5: 352.95,-390.79 ccw(c334.65,-334.65) 393.7,-334.65 393.7,-255.91 393.7,255.91 393.7,334.65 ccw(c334.65,334.65) 334.65,393.7 255.91,393.7 -255.91,393.7 -334.65,393.7 ccw(c-334.65,334.65) -393.7,334.65 -393.7,255.91 -393.7,-255.91 -393.7,-334.65 ccw(c-334.65,-334.65) -334.65,-393.7 -255.91,-393.7 334.65,-393.7 ccw(c334.65,-334.65) 352.95,-390.79 ; 352.95,-390.79 255.91,-390.79 352.95,-390.79
Drill Drawing:
  circle w10: c-289.38,1010.83 r33.33
  lines w10: -322.71,744.17 -256.04,744.17 -289.38,677.5 -322.71,744.17 ; -322.71,827.5 -256.04,827.5 -256.04,894.17 -322.71,894.17 -322.71,827.5
  lines w15: -382.5,632.5 12152.01,632.5 ; -382.5,1082.5 12152.01,1082.5 ; 168.38,482.5 168.38,1232.5 ; 758.22,482.5 758.22,1232.5 ; 1847.9,482.5 1847.9,1232.5 ; 2353.78,482.5 2353.78,1232.5 ; 3087.58,482.5 3087.58,1232.5 ; 4277.24,482.5 4277.24,1232.5 ; 4867.08,482.5 4867.08,1232.5 ; 5612.88,482.5 5612.88,1232.5 ; 6362.68,482.5 6362.68,1232.5 ; 7216.44,482.5 7216.44,1232.5 ; 8550.05,482.5 8550.05,1232.5 ; 9883.65,482.5 9883.65,1232.5 ; 10749.41,482.5 10749.41,1232.5 ; -382.5,482.5 12152.01,482.5 12152.01,1232.5 -382.5,1232.5 -382.5,482.5
  text "Symbol" at -292.5,1127.5 h72
  text "Count" at 213.38,1127.5 h72
  text "Hole Size" at 803.22,1127.5 h72
  text "Plated" at 1892.9,1127.5 h72
  text "Hole Type" at 2398.78,1127.5 h72
  text "Drill Layer Pair" at 3132.58,1127.5 h72
  text "Via/Pad" at 4322.24,1127.5 h72
  text "Pad Shape" at 4912.08,1127.5 h72
  text "Template" at 5657.88,1127.5 h72
  text "Description" at 6407.68,1127.5 h72
  text "Hole Tolerance (+)" at 7261.44,1127.5 h72
  text "Hole Tolerance (-)" at 8595.05,1127.5 h72
  text "Hole Length" at 9928.65,1127.5 h72
  text "Routed Path Length" at 10794.41,1127.5 h72
  text "4" at 213.38,977.5 h60
  text "82.68mil (2.100mm)" at 803.22,977.5 h60
  text "PTH" at 1892.9,977.5 h60
  text "Round" at 2398.78,977.5 h60
  text "Top1 - Bottom4" at 3132.58,977.5 h60
  text "Pad" at 4322.24,977.5 h60
  text "Rounded" at 4912.08,977.5 h60
  text "c300h210" at 5657.88,977.5 h60
  text "-" at 9928.65,977.5 h60
  text "-" at 10794.41,977.5 h60
  text "19" at 213.38,827.5 h60
  text "15.75mil (0.400mm)" at 803.22,827.5 h60
  text "PTH" at 1892.9,827.5 h60
  text "Round" at 2398.78,827.5 h60
  text "Top1 - Bottom4" at 3132.58,827.5 h60
  text "Via" at 4322.24,827.5 h60
  text "Rounded" at 4912.08,827.5 h60
  text "v60h40m0mx0" at 5657.88,827.5 h60
  text "-" at 9928.65,827.5 h60
  text "-" at 10794.41,827.5 h60
  text "101" at 213.38,677.5 h60
  text "10.00mil (0.254mm)" at 803.22,677.5 h60
  text "PTH" at 1892.9,677.5 h60
  text "Round" at 2398.78,677.5 h60
  text "Top1 - Bottom4" at 3132.58,677.5 h60
  text "Via" at 4322.24,677.5 h60
  text "Rounded" at 4912.08,677.5 h60
  text "v46h25m0mx0" at 5657.88,677.5 h60
  text "-" at 9928.65,677.5 h60
  text "-" at 10794.41,677.5 h60
  text "124 Total" at 213.38,527.5 h60